# EAGLE board MicroMod-Artemis-ProcessorBoard-Panel (EAGLE 9.6.2), part 1 of 8
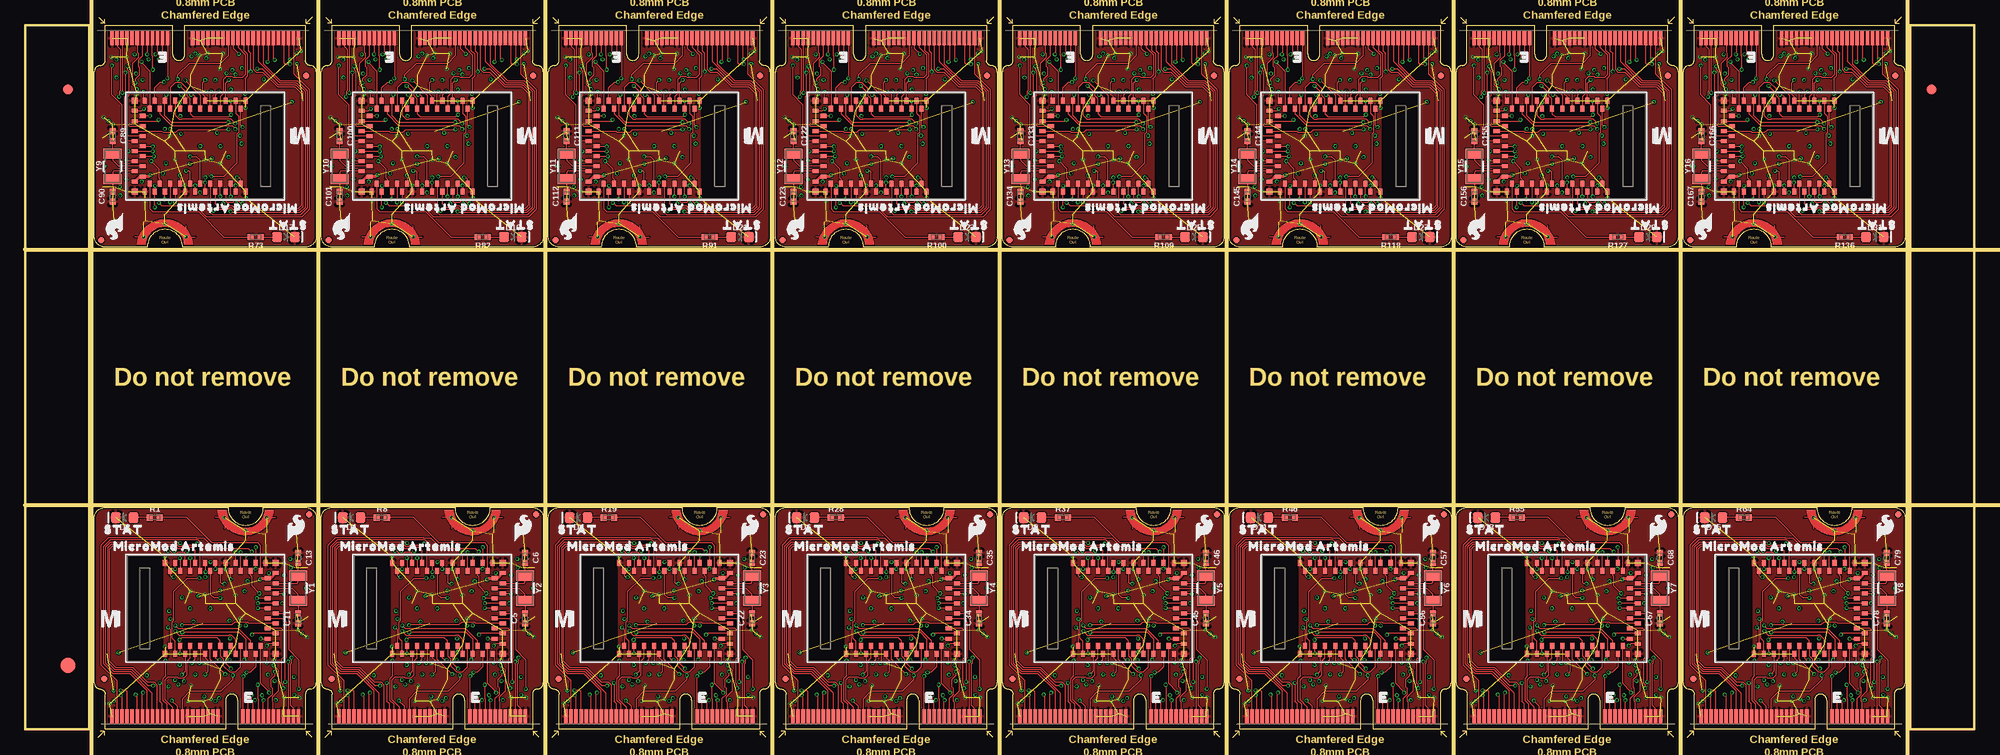
[diagram p0: board, top side]
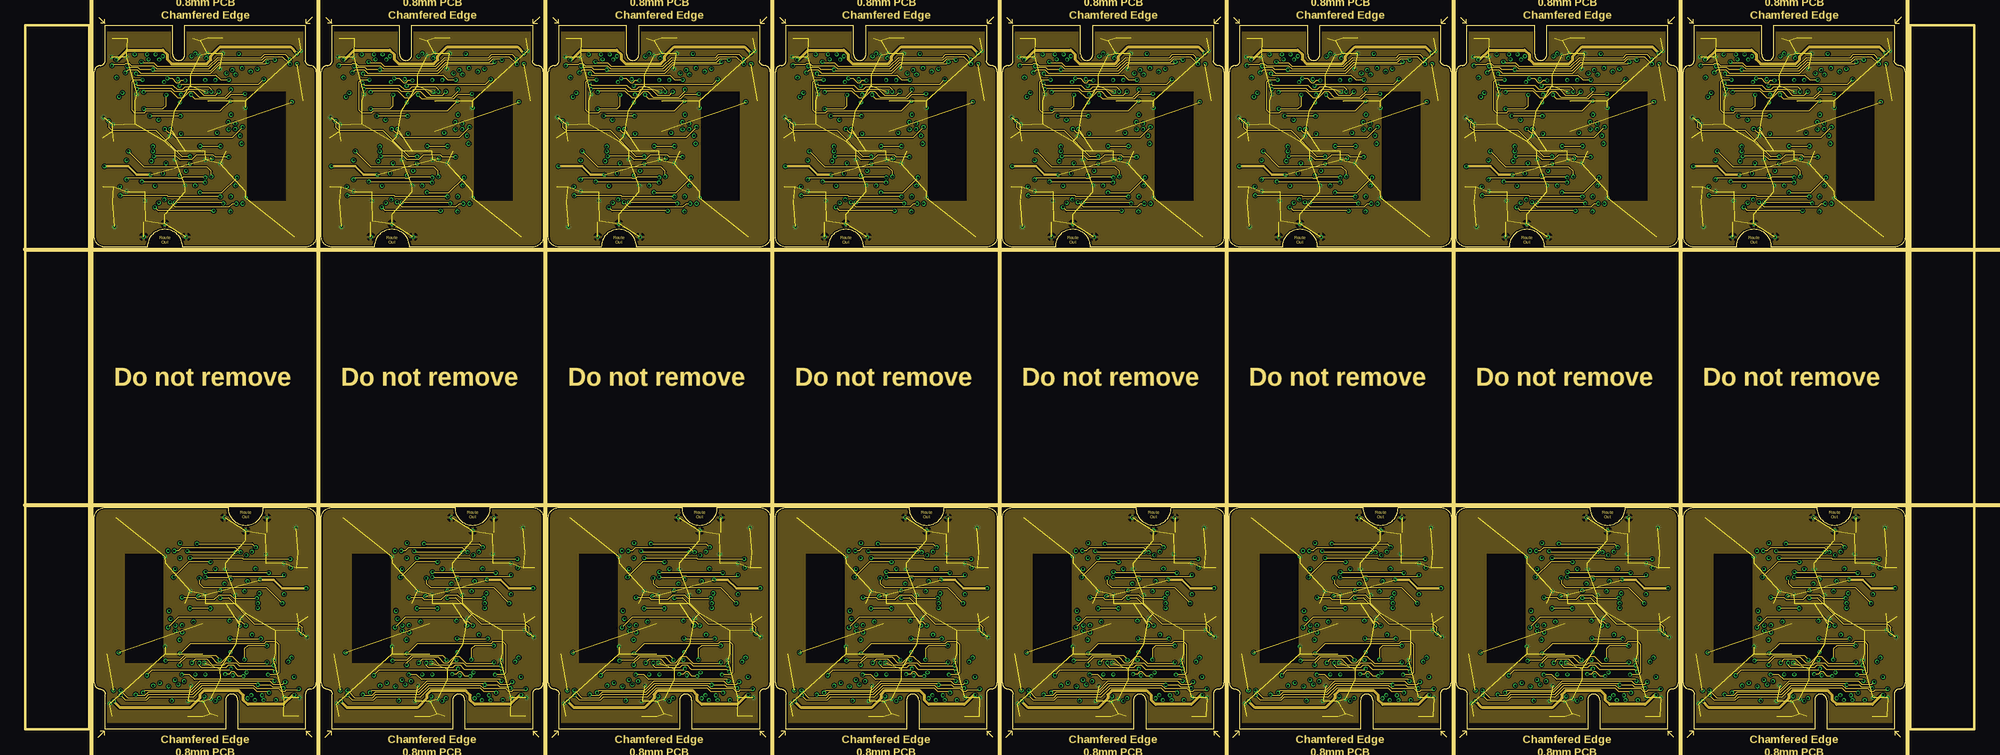
[diagram p1: board, inner layer Route2]
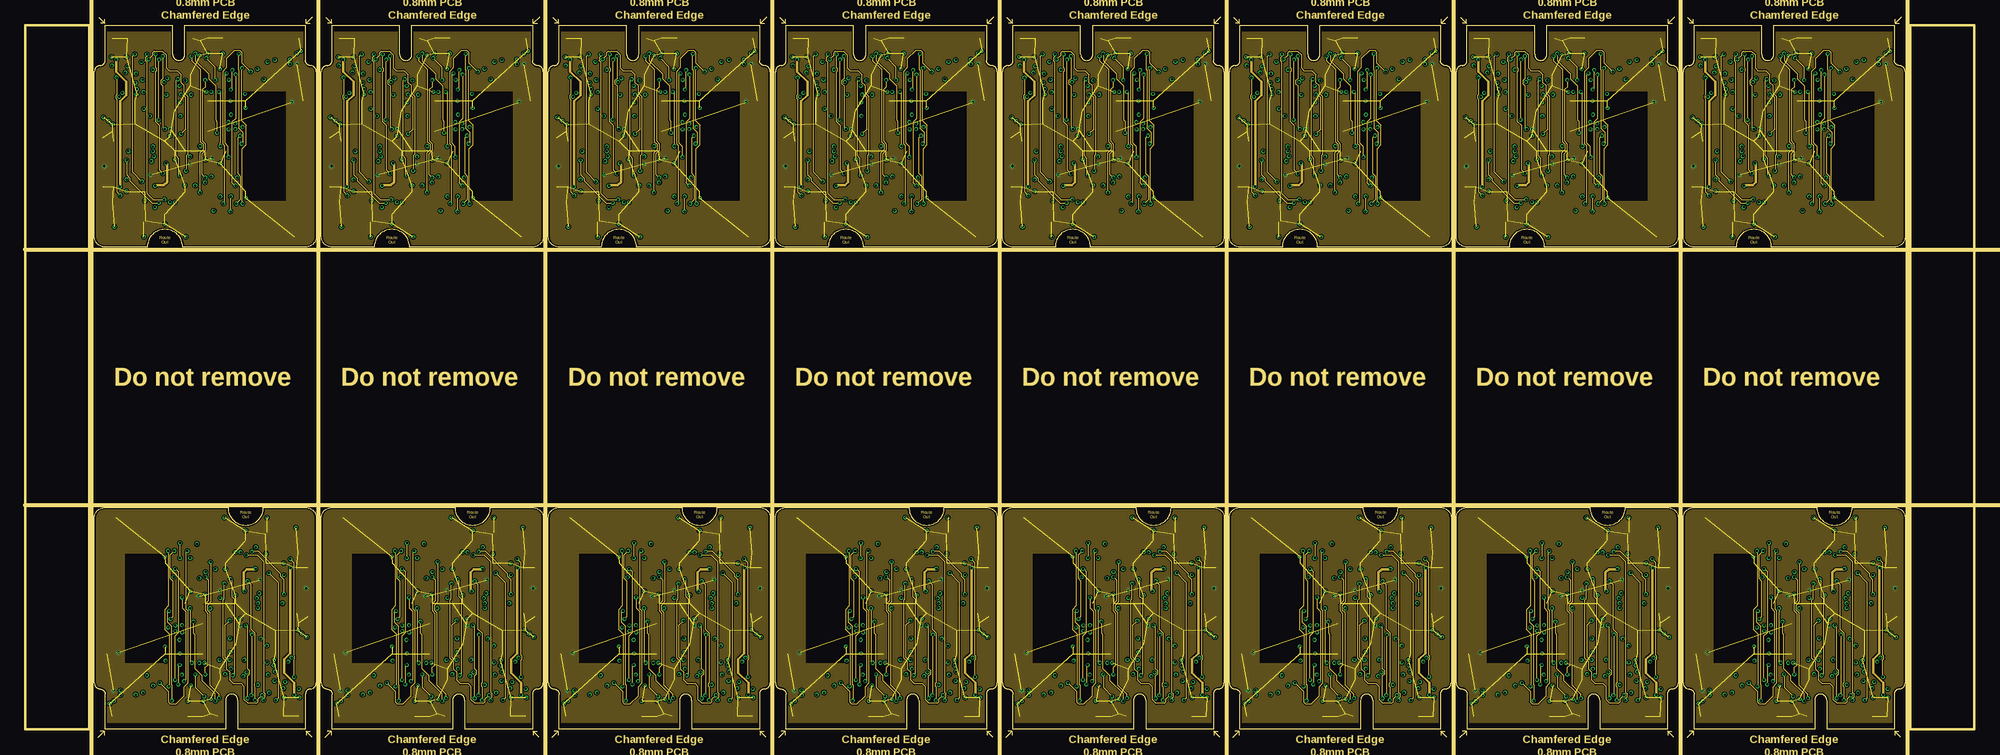
[diagram p2: board, inner layer Route15]
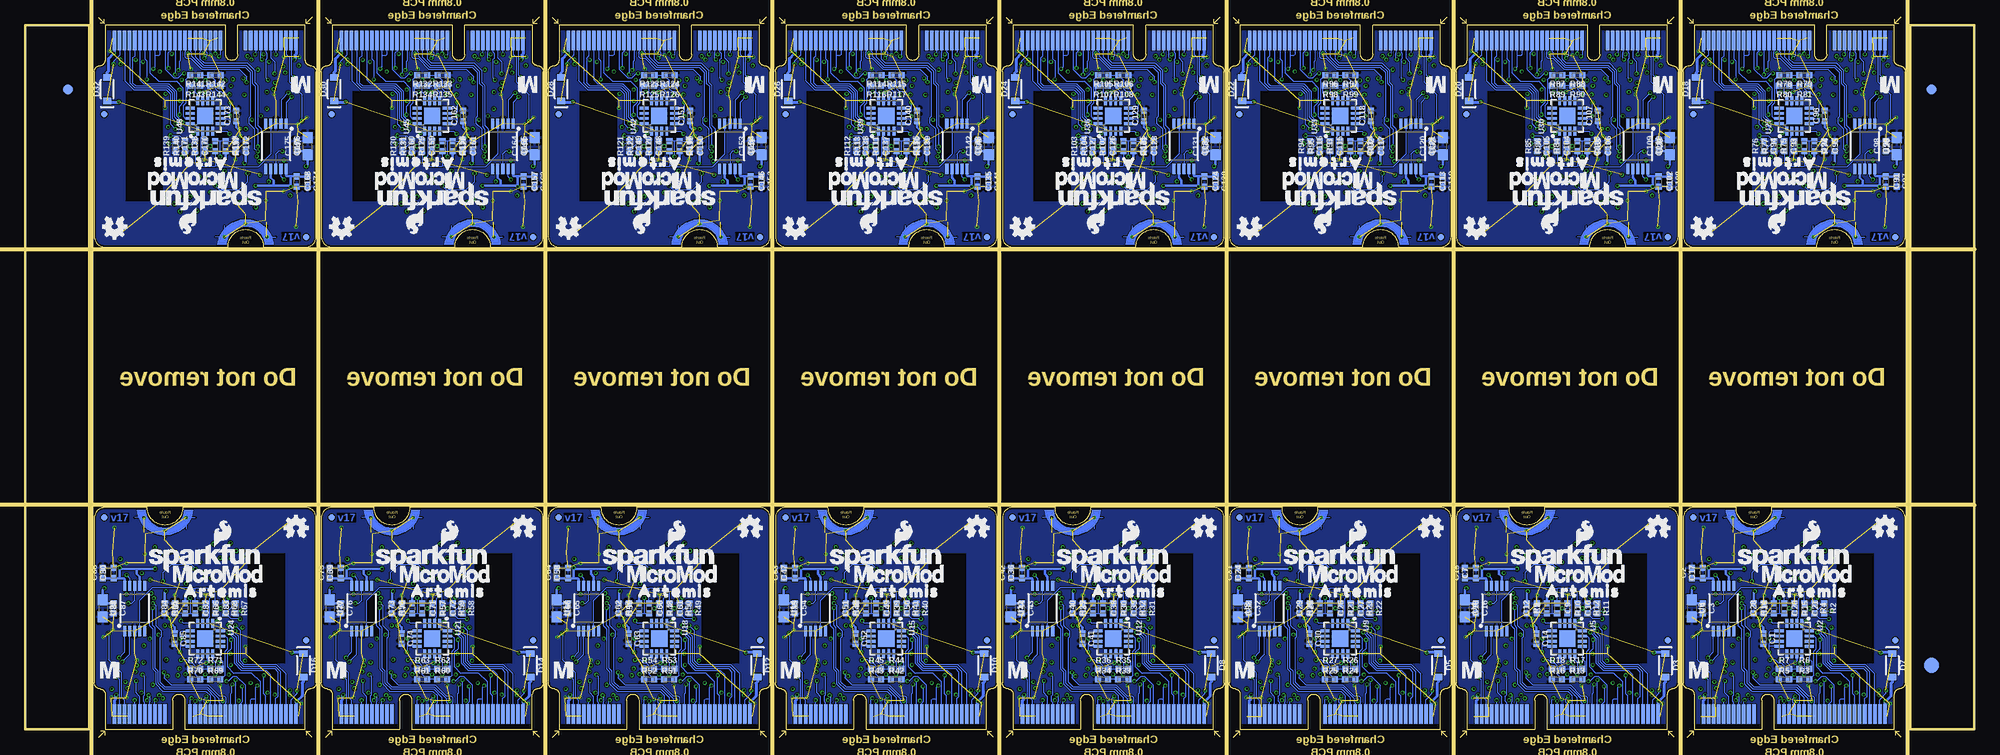
[diagram p3: board, bottom side, seen from below]

Size 193.27 x 69.85 mm. Coordinates in mm from the lower left corner, seen from the top.
Outline: 328 segments
Copper layers (1+2*15+16): Top 0.035mm / dielectric 1.5mm / Route2 0.035mm / dielectric 0.15mm / Route15 0.035mm / dielectric 0.2mm / Bottom 0.035mm
Design rules "MicroMod-Artemis-ProcessorBoard": minimum track width 4mil, minimum drill 0.2mm, track to track 4mil, track to pad 4mil, pad to pad 4mil, via to via 4mil, smd to smd 4mil, copper to edge 6mil, drill to drill 6mil, minimum pad ring 3mil, minimum via ring 3mil, stop-mask expansion 4mil, vias tented up to drill 25mil, thermal gap 10mil
Net classes: 0 default: width 0 mm, drill 0 mm
tKeepout: area 10,6.6 to 13.5,17.3; area 32.5,6.6 to 36,17.3; area 55,6.6 to 58.5,17.3; area 77.5,6.6 to 81,17.3; area 100,6.6 to 103.5,17.3; area 122.5,6.6 to 126,17.3; area 145,6.6 to 148.5,17.3; area 167.5,6.6 to 171,17.3; area 22.3,52.5 to 25.8,63.2; area 44.8,52.5 to 48.3,63.2; area 67.3,52.5 to 70.8,63.2; area 89.8,52.5 to 93.3,63.2; 4 more areas
Milling: 11 lines

## Footprints (pad centres in the part's own frame; a part is rotated, then mirrored left to right if it is on the bottom)
0402-TIGHT = smd 0.6 x 0.6: 1 -0.5,0; 2 0.5,0
0603 = smd 1.1 x 1: 1 -0.85,0; 2 0.85,0
LED-0603 = smd 1 x 1: A -0.877,0; C 0.877,0
SOD-323 = smd 0.63 x 0.83: A 1.15,0; C -1.15,0
FIDUCIAL-1X2 = smd 1 x 1: 1 0,0
FIDUCIAL-1.5X3 = smd 1.5 x 1.5: 1 0,0
FIDUCIAL-MICRO = smd 0.635 x 0.635: 1 0,0
M.2-CARD-E-22 = smd 0.35 x 1.45: 1 9.25,1.275; 3 8.75,1.275; 5 8.25,1.275; 7 7.75,1.275; 9 7.25,1.275; 11 6.75,1.275; 13 6.25,1.275; 15 5.75,1.275; 17 5.25,1.275; 19 4.75,1.275; 21 4.25,1.275; 23 3.75,1.275; 33 1.25,1.275; 35 0.75,1.275; 37 0.25,1.275; 39 -0.25,1.275; 41 -0.75,1.275; 43 -1.25,1.275; 45 -1.75,1.275; 47 -2.25,1.275; 49 -2.75,1.275; 51 -3.25,1.275; 53 -3.75,1.275; 55 -4.25,1.275; 57 -4.75,1.275; 59 -5.25,1.275; 61 -5.75,1.275; 63 -6.25,1.275; 65 -6.75,1.275; 67 -7.25,1.275; 69 -7.75,1.275; 71 -8.25,1.275; 73 -8.75,1.275; 75 -9.25,1.275 | smd 0.35 x 1.95 bottom: 2 9,1.525; 4 8.5,1.525; 6 8,1.525; 8 7.5,1.525; 10 7,1.525; 12 6.5,1.525; 14 6,1.525; 16 5.5,1.525; 18 5,1.525; 20 4.5,1.525; 22 4,1.525; 32 1.5,1.525; 34 1,1.525; 36 0.5,1.525; 38 0,1.525; 40 -0.5,1.525; 42 -1,1.525; 44 -1.5,1.525; 46 -2,1.525; 48 -2.5,1.525; 50 -3,1.525; 52 -3.5,1.525; 54 -4,1.525; 56 -4.5,1.525; 58 -5,1.525; 60 -5.5,1.525; 62 -6,1.525; 64 -6.5,1.525; 66 -7,1.525; 68 -7.5,1.525; 70 -8,1.525; 72 -8.5,1.525; 74 -9,1.525 | drill 0.2: GND1 1.9,21; GND2 4,19.7; GND3 6.1,21
ARTEMIS_FP = smd 0.4 x 0.6: AD16 -4,-3.7; BOOT 1.5,4.5; D0 0.5,-4.5; D1 -0.5,-4.5; D2 -1,-3.7; D3 2,-3.7; D7 -1.5,4.5; D8 -0.5,4.5; D9 2,3.7; D10 1,3.7; D14 -5,3.7; D17 -3.5,-4.5; D36 2.5,-4.5; D38 3,-3.7; D40 2.5,4.5; D41 -2.5,-4.5; GND@1 4.5,4.5; GND@39 -5.5,-4.5; GND@47 -1.5,-4.5; GND@59 4.5,-4.5; RXI-0 3.5,4.5; SWDCK 4,3.7; SWDIO 0,3.7; TXO-0 0.5,4.5; ~AD31 -3,-3.7; ~AD35 -2,3.7; ~D4 -2.5,4.5; ~D5 -1,3.7; ~D18 -4.5,-4.5; ~D19 -5,-3.7; ~D22 -3.5,4.5; ~D23 -4,3.7; ~D24 -3,3.7; ~D27 -4.5,4.5; ~D28 -5.5,4.5; ~D37 3.5,-4.5; ~D39 3,3.7; ~D42 1.5,-4.5; ~D43 1,-3.7; ~D44 4,-3.7; ~D45 -2,-3.7; ~RST 0,-3.7 | smd 0.6 x 0.4: AD34 -6.5,-0.5; D15 -6.5,0.5; VDD@36 -5.7,-3; VDD@37 -6.5,-3.5; XI -6.5,-2.5; XO -5.7,-2; ~AD11 -5.7,-1; ~AD12 -5.7,2; ~AD13 -5.7,1; ~AD29 -6.5,-1.5; ~AD32 -5.7,3; ~AD33/SWO -5.7,0; ~D6 -6.5,3.5; ~D25 -6.5,2.5; ~D26 -6.5,1.5 | smd 0.6 x 0.6: GND@22 -6.5,4.5; GND@38 -6.5,-4.5
QFN-16 = smd 0.9 x 0.29: 1 -1.5,0.75; 2 -1.5,0.25; 3 -1.5,-0.25; 4 -1.5,-0.75; 9 1.5,-0.75; 10 1.5,-0.25; 11 1.5,0.25; 12 1.5,0.75 | smd 0.29 x 0.9: 5 -0.75,-1.5; 6 -0.25,-1.5; 7 0.25,-1.5; 8 0.75,-1.5; 13 0.765,1.5; 14 0.25,1.5; 15 -0.25,1.5; 16 -0.75,1.5 | smd 1.6 x 1.6: 17 0,0
MSOP10 = smd 1 x 0.3: 1 -2.25,1; 2 -2.25,0.5; 3 -2.25,0; 4 -2.25,-0.5; 5 -2.25,-1; 6 2.25,-1; 7 2.25,-0.5; 8 2.25,0; 9 2.25,0.5; 10 2.25,1
CRYSTAL-SMD-3.2X1.5MM = smd 1 x 1.8: P$1 -1.25,0; P$2 1.25,0

## Placement (x,y rotation side)
C1  0.1uF  [0402-TIGHT]  20.91,9 270 bottom
C2  0.22uF  [0402-TIGHT]  28.02,15.5 90 bottom
C3  1.0uF  [0402-TIGHT]  26.92,12 270 bottom
C4  10uF  [0603]  28.02,12 270 bottom
C5  15pF  [0402-TIGHT]  49.56,11 90 top
C6  15pF  [0402-TIGHT]  49.56,17 270 top
C7  10nF  [0402-TIGHT]  49.42,15.5 90 bottom
C8  0.1uF  [0402-TIGHT]  44.36,12 270 bottom
C9  0.1uF  [0402-TIGHT]  41.36,12 270 bottom
C10  0.1uF  [0402-TIGHT]  39.36,12 270 bottom
C11  15pF  [0402-TIGHT]  27.06,11 90 top
C12  1.0nF  [0402-TIGHT]  43.36,12 90 bottom
C13  15pF  [0402-TIGHT]  27.06,17 270 top
C14  0.1uF  [0402-TIGHT]  43.41,9 270 bottom
C15  0.22uF  [0402-TIGHT]  50.52,15.5 90 bottom
C16  1.0uF  [0402-TIGHT]  49.42,12 270 bottom
C17  10nF  [0402-TIGHT]  26.92,15.5 90 bottom
C18  0.1uF  [0402-TIGHT]  21.86,12 270 bottom
C19  10uF  [0603]  50.52,12 270 bottom
C20  0.1uF  [0402-TIGHT]  18.86,12 270 bottom
C21  0.1uF  [0402-TIGHT]  16.86,12 270 bottom
C22  15pF  [0402-TIGHT]  72.07,11 90 top
C23  15pF  [0402-TIGHT]  72.07,17 270 top
C24  10nF  [0402-TIGHT]  71.93,15.5 90 bottom
C25  0.1uF  [0402-TIGHT]  66.87,12 270 bottom
C26  0.1uF  [0402-TIGHT]  63.87,12 270 bottom
C27  0.1uF  [0402-TIGHT]  61.87,12 270 bottom
C28  1.0nF  [0402-TIGHT]  20.86,12 90 bottom
C29  1.0nF  [0402-TIGHT]  65.87,12 90 bottom
C30  0.1uF  [0402-TIGHT]  65.92,9 270 bottom
C31  0.22uF  [0402-TIGHT]  73.03,15.5 90 bottom
C32  1.0uF  [0402-TIGHT]  71.93,12 270 bottom
C33  10uF  [0603]  73.03,12 270 bottom
C34  15pF  [0402-TIGHT]  94.58,11 90 top
C35  15pF  [0402-TIGHT]  94.58,17 270 top
C36  10nF  [0402-TIGHT]  94.44,15.5 90 bottom
C37  0.1uF  [0402-TIGHT]  89.38,12 270 bottom
C38  0.1uF  [0402-TIGHT]  86.38,12 270 bottom
C39  0.1uF  [0402-TIGHT]  84.38,12 270 bottom
C40  1.0nF  [0402-TIGHT]  88.38,12 90 bottom
C41  0.1uF  [0402-TIGHT]  88.43,9 270 bottom
C42  0.22uF  [0402-TIGHT]  95.54,15.5 90 bottom
C43  1.0uF  [0402-TIGHT]  94.44,12 270 bottom
C44  10uF  [0603]  95.54,12 270 bottom
C45  15pF  [0402-TIGHT]  117.09,11 90 top
C46  15pF  [0402-TIGHT]  117.09,17 270 top
C47  10nF  [0402-TIGHT]  116.95,15.5 90 bottom
C48  0.1uF  [0402-TIGHT]  111.89,12 270 bottom
C49  0.1uF  [0402-TIGHT]  108.89,12 270 bottom
C50  0.1uF  [0402-TIGHT]  106.89,12 270 bottom
C51  1.0nF  [0402-TIGHT]  110.89,12 90 bottom
C52  0.1uF  [0402-TIGHT]  110.94,9 270 bottom
C53  0.22uF  [0402-TIGHT]  118.05,15.5 90 bottom
C54  1.0uF  [0402-TIGHT]  116.95,12 270 bottom
C55  10uF  [0603]  118.05,12 270 bottom
C56  15pF  [0402-TIGHT]  139.6,11 90 top
C57  15pF  [0402-TIGHT]  139.6,17 270 top
C58  10nF  [0402-TIGHT]  139.46,15.5 90 bottom
C59  0.1uF  [0402-TIGHT]  134.4,12 270 bottom
C60  0.1uF  [0402-TIGHT]  131.4,12 270 bottom
C61  0.1uF  [0402-TIGHT]  129.4,12 270 bottom
C62  1.0nF  [0402-TIGHT]  133.4,12 90 bottom
C63  0.1uF  [0402-TIGHT]  133.45,9 270 bottom
C64  0.22uF  [0402-TIGHT]  140.56,15.5 90 bottom
C65  1.0uF  [0402-TIGHT]  139.46,12 270 bottom
C66  10uF  [0603]  140.56,12 270 bottom
C67  15pF  [0402-TIGHT]  162.11,11 90 top
C68  15pF  [0402-TIGHT]  162.11,17 270 top
C69  10nF  [0402-TIGHT]  161.97,15.5 90 bottom
C70  0.1uF  [0402-TIGHT]  156.91,12 270 bottom
C71  0.1uF  [0402-TIGHT]  153.91,12 270 bottom
C72  0.1uF  [0402-TIGHT]  151.91,12 270 bottom
C73  1.0nF  [0402-TIGHT]  155.91,12 90 bottom
C74  0.1uF  [0402-TIGHT]  155.96,9 270 bottom
C75  0.22uF  [0402-TIGHT]  163.07,15.5 90 bottom
C76  1.0uF  [0402-TIGHT]  161.97,12 270 bottom
C77  10uF  [0603]  163.07,12 270 bottom
C78  15pF  [0402-TIGHT]  184.61,11 90 top
C79  15pF  [0402-TIGHT]  184.61,17 270 top
C80  10nF  [0402-TIGHT]  184.47,15.5 90 bottom
C81  0.1uF  [0402-TIGHT]  179.41,12 270 bottom
C82  0.1uF  [0402-TIGHT]  176.41,12 270 bottom
C83  0.1uF  [0402-TIGHT]  174.41,12 270 bottom
C84  1.0nF  [0402-TIGHT]  178.41,12 90 bottom
C85  0.1uF  [0402-TIGHT]  178.46,9 270 bottom
C86  0.22uF  [0402-TIGHT]  185.57,15.5 90 bottom
C87  1.0uF  [0402-TIGHT]  184.47,12 270 bottom
C88  10uF  [0603]  185.57,12 270 bottom
C89  15pF  [0402-TIGHT]  8.66,58.85 270 top
C90  15pF  [0402-TIGHT]  8.66,52.85 90 top
C91  10nF  [0402-TIGHT]  8.8,54.35 270 bottom
C92  0.1uF  [0402-TIGHT]  13.86,57.85 90 bottom
C93  0.1uF  [0402-TIGHT]  16.86,57.85 90 bottom
C94  0.1uF  [0402-TIGHT]  18.86,57.85 90 bottom
C95  1.0nF  [0402-TIGHT]  14.86,57.85 270 bottom
C96  0.1uF  [0402-TIGHT]  14.81,60.85 90 bottom
C97  0.22uF  [0402-TIGHT]  7.7,54.35 270 bottom
C98  1.0uF  [0402-TIGHT]  8.8,57.85 90 bottom
C99  10uF  [0603]  7.7,57.85 90 bottom
C100  15pF  [0402-TIGHT]  31.17,58.85 270 top
C101  15pF  [0402-TIGHT]  31.17,52.85 90 top
C102  10nF  [0402-TIGHT]  31.31,54.35 270 bottom
C103  0.1uF  [0402-TIGHT]  36.37,57.85 90 bottom
C104  0.1uF  [0402-TIGHT]  39.37,57.85 90 bottom
C105  0.1uF  [0402-TIGHT]  41.37,57.85 90 bottom
C106  1.0nF  [0402-TIGHT]  37.37,57.85 270 bottom
C107  0.1uF  [0402-TIGHT]  37.32,60.85 90 bottom
C108  0.22uF  [0402-TIGHT]  30.21,54.35 270 bottom
C109  1.0uF  [0402-TIGHT]  31.31,57.85 90 bottom
C110  10uF  [0603]  30.21,57.85 90 bottom
C111  15pF  [0402-TIGHT]  53.67,58.85 270 top
C112  15pF  [0402-TIGHT]  53.67,52.85 90 top
C113  10nF  [0402-TIGHT]  53.81,54.35 270 bottom
C114  0.1uF  [0402-TIGHT]  58.87,57.85 90 bottom
C115  0.1uF  [0402-TIGHT]  61.87,57.85 90 bottom
C116  0.1uF  [0402-TIGHT]  63.87,57.85 90 bottom
C117  1.0nF  [0402-TIGHT]  59.87,57.85 270 bottom
C118  0.1uF  [0402-TIGHT]  59.82,60.85 90 bottom
C119  0.22uF  [0402-TIGHT]  52.71,54.35 270 bottom
C120  1.0uF  [0402-TIGHT]  53.81,57.85 90 bottom
C121  10uF  [0603]  52.71,57.85 90 bottom
C122  15pF  [0402-TIGHT]  76.18,58.85 270 top
C123  15pF  [0402-TIGHT]  76.18,52.85 90 top
C124  10nF  [0402-TIGHT]  76.32,54.35 270 bottom
C125  0.1uF  [0402-TIGHT]  81.38,57.85 90 bottom
C126  0.1uF  [0402-TIGHT]  84.38,57.85 90 bottom
C127  0.1uF  [0402-TIGHT]  86.38,57.85 90 bottom
C128  1.0nF  [0402-TIGHT]  82.38,57.85 270 bottom
C129  0.1uF  [0402-TIGHT]  82.33,60.85 90 bottom
C130  0.22uF  [0402-TIGHT]  75.22,54.35 270 bottom
C131  1.0uF  [0402-TIGHT]  76.32,57.85 90 bottom
C132  10uF  [0603]  75.22,57.85 90 bottom
C133  15pF  [0402-TIGHT]  98.69,58.85 270 top
C134  15pF  [0402-TIGHT]  98.69,52.85 90 top
C135  10nF  [0402-TIGHT]  98.83,54.35 270 bottom
C136  0.1uF  [0402-TIGHT]  103.89,57.85 90 bottom
C137  0.1uF  [0402-TIGHT]  106.89,57.85 90 bottom
C138  0.1uF  [0402-TIGHT]  108.89,57.85 90 bottom
C139  1.0nF  [0402-TIGHT]  104.89,57.85 270 bottom
C140  0.1uF  [0402-TIGHT]  104.84,60.85 90 bottom
C141  0.22uF  [0402-TIGHT]  97.73,54.35 270 bottom
C142  1.0uF  [0402-TIGHT]  98.83,57.85 90 bottom
C143  10uF  [0603]  97.73,57.85 90 bottom
C144  15pF  [0402-TIGHT]  121.2,58.85 270 top
C145  15pF  [0402-TIGHT]  121.2,52.85 90 top
C146  10nF  [0402-TIGHT]  121.34,54.35 270 bottom
C147  0.1uF  [0402-TIGHT]  126.4,57.85 90 bottom
C148  0.1uF  [0402-TIGHT]  129.4,57.85 90 bottom
C149  0.1uF  [0402-TIGHT]  131.4,57.85 90 bottom
C150  1.0nF  [0402-TIGHT]  127.4,57.85 270 bottom
C151  0.1uF  [0402-TIGHT]  127.35,60.85 90 bottom
C152  0.22uF  [0402-TIGHT]  120.24,54.35 270 bottom
C153  1.0uF  [0402-TIGHT]  121.34,57.85 90 bottom
C154  10uF  [0603]  120.24,57.85 90 bottom
C155  15pF  [0402-TIGHT]  143.71,58.85 270 top
C156  15pF  [0402-TIGHT]  143.71,52.85 90 top
C157  10nF  [0402-TIGHT]  143.85,54.35 270 bottom
C158  0.1uF  [0402-TIGHT]  148.91,57.85 90 bottom
C159  0.1uF  [0402-TIGHT]  151.91,57.85 90 bottom
C160  0.1uF  [0402-TIGHT]  153.91,57.85 90 bottom
C161  1.0nF  [0402-TIGHT]  149.91,57.85 270 bottom
C162  0.1uF  [0402-TIGHT]  149.86,60.85 90 bottom
C163  0.22uF  [0402-TIGHT]  142.75,54.35 270 bottom
C164  1.0uF  [0402-TIGHT]  143.85,57.85 90 bottom
C165  10uF  [0603]  142.75,57.85 90 bottom
C166  15pF  [0402-TIGHT]  166.21,58.85 270 top
C167  15pF  [0402-TIGHT]  166.21,52.85 90 top
C168  10nF  [0402-TIGHT]  166.35,54.35 270 bottom
C169  0.1uF  [0402-TIGHT]  171.41,57.85 90 bottom
C170  0.1uF  [0402-TIGHT]  174.41,57.85 90 bottom
C171  0.1uF  [0402-TIGHT]  176.41,57.85 90 bottom
C172  1.0nF  [0402-TIGHT]  172.41,57.85 270 bottom
C173  0.1uF  [0402-TIGHT]  172.36,60.85 90 bottom
C174  0.22uF  [0402-TIGHT]  165.25,54.35 270 bottom
C175  1.0uF  [0402-TIGHT]  166.35,57.85 90 bottom
C176  10uF  [0603]  165.25,57.85 90 bottom
D1  BLUE  [LED-0603]  32.36,21 180 top
D2  BLUE  [LED-0603]  9.86,21 180 top
D3  1A/23V/620mV  [SOD-323]  30.63,6.35 270 bottom
D4  BLUE  [LED-0603]  54.87,21 180 top
D5  1A/23V/620mV  [SOD-323]  53.14,6.35 270 bottom
D6  BLUE  [LED-0603]  77.38,21 180 top
D7  1A/23V/620mV  [SOD-323]  8.13,6.35 270 bottom
D8  1A/23V/620mV  [SOD-323]  75.65,6.35 270 bottom
D9  BLUE  [LED-0603]  99.89,21 180 top
D10  1A/23V/620mV  [SOD-323]  98.16,6.35 270 bottom
D11  BLUE  [LED-0603]  122.4,21 180 top
D12  1A/23V/620mV  [SOD-323]  120.67,6.35 270 bottom
D13  BLUE  [LED-0603]  144.91,21 180 top
D14  1A/23V/620mV  [SOD-323]  143.18,6.35 270 bottom
D15  BLUE  [LED-0603]  167.41,21 180 top
D16  1A/23V/620mV  [SOD-323]  165.68,6.35 270 bottom
D17  BLUE  [LED-0603]  25.86,48.85 0 top
D18  1A/23V/620mV  [SOD-323]  27.59,63.5 90 bottom
D19  BLUE  [LED-0603]  48.37,48.85 0 top
D20  1A/23V/620mV  [SOD-323]  50.1,63.5 90 bottom
D21  BLUE  [LED-0603]  70.87,48.85 0 top
D22  1A/23V/620mV  [SOD-323]  72.6,63.5 90 bottom
D23  BLUE  [LED-0603]  93.38,48.85 0 top
D24  1A/23V/620mV  [SOD-323]  95.11,63.5 90 bottom
D25  BLUE  [LED-0603]  115.89,48.85 0 top
D26  1A/23V/620mV  [SOD-323]  117.62,63.5 90 bottom
D27  BLUE  [LED-0603]  138.4,48.85 0 top
D28  1A/23V/620mV  [SOD-323]  140.13,63.5 90 bottom
D29  BLUE  [LED-0603]  160.91,48.85 0 top
D30  1A/23V/620mV  [SOD-323]  162.64,63.5 90 bottom
D31  BLUE  [LED-0603]  183.41,48.85 0 top
D32  1A/23V/620mV  [SOD-323]  185.14,63.5 90 bottom
E$1  [FIDUCIAL-1X2]  4.23,63.5 0 top
E$2  [FIDUCIAL-1X2]  4.23,63.5 0 bottom
E$3  [FIDUCIAL-1X2]  189.04,63.5 0 top
E$4  [FIDUCIAL-1X2]  189.04,63.5 0 bottom
E$5  [FIDUCIAL-1.5X3]  4.23,6.35 0 top
E$6  [FIDUCIAL-1.5X3]  4.23,6.35 0 bottom
FD1  FIDUCIALUFIDUCIAL  [FIDUCIAL-MICRO]  7.86,5 0 top
FD2  FIDUCIALUFIDUCIAL  [FIDUCIAL-MICRO]  28.16,21.3 0 top
FD3  FIDUCIALUFIDUCIAL  [FIDUCIAL-MICRO]  27.86,21 0 bottom
FD4  FIDUCIALUFIDUCIAL  [FIDUCIAL-MICRO]  7.86,8.81 0 bottom
FD5  FIDUCIALUFIDUCIAL  [FIDUCIAL-MICRO]  30.36,5 0 top
FD6  FIDUCIALUFIDUCIAL  [FIDUCIAL-MICRO]  50.66,21.3 0 top
FD7  FIDUCIALUFIDUCIAL  [FIDUCIAL-MICRO]  50.36,21 0 bottom
FD8  FIDUCIALUFIDUCIAL  [FIDUCIAL-MICRO]  30.36,8.81 0 bottom
FD9  FIDUCIALUFIDUCIAL  [FIDUCIAL-MICRO]  52.87,5 0 top
FD10  FIDUCIALUFIDUCIAL  [FIDUCIAL-MICRO]  73.17,21.3 0 top
FD11  FIDUCIALUFIDUCIAL  [FIDUCIAL-MICRO]  72.87,21 0 bottom
FD12  FIDUCIALUFIDUCIAL  [FIDUCIAL-MICRO]  52.87,8.81 0 bottom
FD13  FIDUCIALUFIDUCIAL  [FIDUCIAL-MICRO]  75.38,5 0 top
FD14  FIDUCIALUFIDUCIAL  [FIDUCIAL-MICRO]  95.68,21.3 0 top
FD15  FIDUCIALUFIDUCIAL  [FIDUCIAL-MICRO]  95.38,21 0 bottom
FD16  FIDUCIALUFIDUCIAL  [FIDUCIAL-MICRO]  75.38,8.81 0 bottom
FD17  FIDUCIALUFIDUCIAL  [FIDUCIAL-MICRO]  97.89,5 0 top
FD18  FIDUCIALUFIDUCIAL  [FIDUCIAL-MICRO]  118.19,21.3 0 top
FD19  FIDUCIALUFIDUCIAL  [FIDUCIAL-MICRO]  117.89,21 0 bottom
FD20  FIDUCIALUFIDUCIAL  [FIDUCIAL-MICRO]  97.89,8.81 0 bottom
FD21  FIDUCIALUFIDUCIAL  [FIDUCIAL-MICRO]  120.4,5 0 top
FD22  FIDUCIALUFIDUCIAL  [FIDUCIAL-MICRO]  140.7,21.3 0 top
FD23  FIDUCIALUFIDUCIAL  [FIDUCIAL-MICRO]  140.4,21 0 bottom
FD24  FIDUCIALUFIDUCIAL  [FIDUCIAL-MICRO]  120.4,8.81 0 bottom
FD25  FIDUCIALUFIDUCIAL  [FIDUCIAL-MICRO]  142.91,5 0 top
FD26  FIDUCIALUFIDUCIAL  [FIDUCIAL-MICRO]  163.21,21.3 0 top
FD27  FIDUCIALUFIDUCIAL  [FIDUCIAL-MICRO]  162.91,21 0 bottom
FD28  FIDUCIALUFIDUCIAL  [FIDUCIAL-MICRO]  142.91,8.81 0 bottom
FD29  FIDUCIALUFIDUCIAL  [FIDUCIAL-MICRO]  165.41,5 0 top
FD30  FIDUCIALUFIDUCIAL  [FIDUCIAL-MICRO]  185.71,21.3 0 top
FD31  FIDUCIALUFIDUCIAL  [FIDUCIAL-MICRO]  185.41,21 0 bottom
FD32  FIDUCIALUFIDUCIAL  [FIDUCIAL-MICRO]  165.41,8.81 0 bottom
FD33  FIDUCIALUFIDUCIAL  [FIDUCIAL-MICRO]  27.86,64.85 180 top
FD34  FIDUCIALUFIDUCIAL  [FIDUCIAL-MICRO]  7.56,48.55 180 top
FD35  FIDUCIALUFIDUCIAL  [FIDUCIAL-MICRO]  7.86,48.85 180 bottom
FD36  FIDUCIALUFIDUCIAL  [FIDUCIAL-MICRO]  27.86,61.04 180 bottom
FD37  FIDUCIALUFIDUCIAL  [FIDUCIAL-MICRO]  50.37,64.85 180 top
FD38  FIDUCIALUFIDUCIAL  [FIDUCIAL-MICRO]  30.07,48.55 180 top
FD39  FIDUCIALUFIDUCIAL  [FIDUCIAL-MICRO]  30.37,48.85 180 bottom
FD40  FIDUCIALUFIDUCIAL  [FIDUCIAL-MICRO]  50.37,61.04 180 bottom
FD41  FIDUCIALUFIDUCIAL  [FIDUCIAL-MICRO]  72.87,64.85 180 top
FD42  FIDUCIALUFIDUCIAL  [FIDUCIAL-MICRO]  52.57,48.55 180 top
FD43  FIDUCIALUFIDUCIAL  [FIDUCIAL-MICRO]  52.87,48.85 180 bottom
FD44  FIDUCIALUFIDUCIAL  [FIDUCIAL-MICRO]  72.87,61.04 180 bottom
FD45  FIDUCIALUFIDUCIAL  [FIDUCIAL-MICRO]  95.38,64.85 180 top
FD46  FIDUCIALUFIDUCIAL  [FIDUCIAL-MICRO]  75.08,48.55 180 top
FD47  FIDUCIALUFIDUCIAL  [FIDUCIAL-MICRO]  75.38,48.85 180 bottom
FD48  FIDUCIALUFIDUCIAL  [FIDUCIAL-MICRO]  95.38,61.04 180 bottom
FD49  FIDUCIALUFIDUCIAL  [FIDUCIAL-MICRO]  117.89,64.85 180 top
FD50  FIDUCIALUFIDUCIAL  [FIDUCIAL-MICRO]  97.59,48.55 180 top
FD51  FIDUCIALUFIDUCIAL  [FIDUCIAL-MICRO]  97.89,48.85 180 bottom
FD52  FIDUCIALUFIDUCIAL  [FIDUCIAL-MICRO]  117.89,61.04 180 bottom
FD53  FIDUCIALUFIDUCIAL  [FIDUCIAL-MICRO]  140.4,64.85 180 top
FD54  FIDUCIALUFIDUCIAL  [FIDUCIAL-MICRO]  120.1,48.55 180 top
FD55  FIDUCIALUFIDUCIAL  [FIDUCIAL-MICRO]  120.4,48.85 180 bottom
FD56  FIDUCIALUFIDUCIAL  [FIDUCIAL-MICRO]  140.4,61.04 180 bottom
FD57  FIDUCIALUFIDUCIAL  [FIDUCIAL-MICRO]  162.91,64.85 180 top
FD58  FIDUCIALUFIDUCIAL  [FIDUCIAL-MICRO]  142.61,48.55 180 top
FD59  FIDUCIALUFIDUCIAL  [FIDUCIAL-MICRO]  142.91,48.85 180 bottom
FD60  FIDUCIALUFIDUCIAL  [FIDUCIAL-MICRO]  162.91,61.04 180 bottom
FD61  FIDUCIALUFIDUCIAL  [FIDUCIAL-MICRO]  185.41,64.85 180 top
FD62  FIDUCIALUFIDUCIAL  [FIDUCIAL-MICRO]  165.11,48.55 180 top
FD63  FIDUCIALUFIDUCIAL  [FIDUCIAL-MICRO]  165.41,48.85 180 bottom
FD64  FIDUCIALUFIDUCIAL  [FIDUCIAL-MICRO]  185.41,61.04 180 bottom
J1  MICROMOD-2222  [M.2-CARD-E-22]  17.86,0 0 top
J2  MICROMOD-2222  [M.2-CARD-E-22]  40.36,0 0 top
J3  MICROMOD-2222  [M.2-CARD-E-22]  62.87,0 0 top
J4  MICROMOD-2222  [M.2-CARD-E-22]  85.38,0 0 top
J5  MICROMOD-2222  [M.2-CARD-E-22]  107.89,0 0 top
J6  MICROMOD-2222  [M.2-CARD-E-22]  130.4,0 0 top
J7  MICROMOD-2222  [M.2-CARD-E-22]  152.91,0 0 top
J8  MICROMOD-2222  [M.2-CARD-E-22]  175.41,0 0 top
J9  MICROMOD-2222  [M.2-CARD-E-22]  17.86,69.85 180 top
J10  MICROMOD-2222  [M.2-CARD-E-22]  40.37,69.85 180 top
J11  MICROMOD-2222  [M.2-CARD-E-22]  62.87,69.85 180 top
J12  MICROMOD-2222  [M.2-CARD-E-22]  85.38,69.85 180 top
J13  MICROMOD-2222  [M.2-CARD-E-22]  107.89,69.85 180 top
J14  MICROMOD-2222  [M.2-CARD-E-22]  130.4,69.85 180 top
J15  MICROMOD-2222  [M.2-CARD-E-22]  152.91,69.85 180 top
J16  MICROMOD-2222  [M.2-CARD-E-22]  175.41,69.85 180 top
LOGO1  SFE_LOGO_NAME_FLAME.1_INCH  [SFE_LOGO_NAME_FLAME_.1]  17.86,17 0 bottom
LOGO2  SFE_LOGO_FLAME.1_INCH  [SFE_LOGO_FLAME_.1]  26.86,20 0 top
LOGO3  OSHW-LOGOMINI  [OSHW-LOGO-MINI]  8.86,20 0 bottom
LOGO4  OSHW-LOGOMINI  [OSHW-LOGO-MINI]  31.36,20 0 bottom
LOGO5  SFE_LOGO_NAME_FLAME.1_INCH  [SFE_LOGO_NAME_FLAME_.1]  40.36,17 0 bottom
LOGO6  SFE_LOGO_FLAME.1_INCH  [SFE_LOGO_FLAME_.1]  49.36,20 0 top
LOGO7  OSHW-LOGOMINI  [OSHW-LOGO-MINI]  53.87,20 0 bottom
LOGO8  SFE_LOGO_NAME_FLAME.1_INCH  [SFE_LOGO_NAME_FLAME_.1]  62.87,17 0 bottom
LOGO9  SFE_LOGO_FLAME.1_INCH  [SFE_LOGO_FLAME_.1]  71.87,20 0 top
LOGO10  OSHW-LOGOMINI  [OSHW-LOGO-MINI]  76.38,20 0 bottom
LOGO11  SFE_LOGO_NAME_FLAME.1_INCH  [SFE_LOGO_NAME_FLAME_.1]  85.38,17 0 bottom
LOGO12  SFE_LOGO_FLAME.1_INCH  [SFE_LOGO_FLAME_.1]  94.38,20 0 top
LOGO13  OSHW-LOGOMINI  [OSHW-LOGO-MINI]  98.89,20 0 bottom
LOGO14  SFE_LOGO_NAME_FLAME.1_INCH  [SFE_LOGO_NAME_FLAME_.1]  107.89,17 0 bottom
LOGO15  SFE_LOGO_FLAME.1_INCH  [SFE_LOGO_FLAME_.1]  116.89,20 0 top
LOGO16  OSHW-LOGOMINI  [OSHW-LOGO-MINI]  121.4,20 0 bottom
LOGO17  SFE_LOGO_NAME_FLAME.1_INCH  [SFE_LOGO_NAME_FLAME_.1]  130.4,17 0 bottom
LOGO18  SFE_LOGO_FLAME.1_INCH  [SFE_LOGO_FLAME_.1]  139.4,20 0 top
LOGO19  OSHW-LOGOMINI  [OSHW-LOGO-MINI]  143.91,20 0 bottom
LOGO20  SFE_LOGO_NAME_FLAME.1_INCH  [SFE_LOGO_NAME_FLAME_.1]  152.91,17 0 bottom
LOGO21  SFE_LOGO_FLAME.1_INCH  [SFE_LOGO_FLAME_.1]  161.91,20 0 top
LOGO22  OSHW-LOGOMINI  [OSHW-LOGO-MINI]  166.41,20 0 bottom
LOGO23  SFE_LOGO_NAME_FLAME.1_INCH  [SFE_LOGO_NAME_FLAME_.1]  175.41,17 0 bottom
LOGO24  SFE_LOGO_FLAME.1_INCH  [SFE_LOGO_FLAME_.1]  184.41,20 0 top
LOGO25  OSHW-LOGOMINI  [OSHW-LOGO-MINI]  26.86,49.85 180 bottom
LOGO26  SFE_LOGO_NAME_FLAME.1_INCH  [SFE_LOGO_NAME_FLAME_.1]  17.86,52.85 180 bottom
LOGO27  SFE_LOGO_FLAME.1_INCH  [SFE_LOGO_FLAME_.1]  8.86,49.85 180 top
LOGO28  OSHW-LOGOMINI  [OSHW-LOGO-MINI]  49.37,49.85 180 bottom
LOGO29  SFE_LOGO_NAME_FLAME.1_INCH  [SFE_LOGO_NAME_FLAME_.1]  40.37,52.85 180 bottom
LOGO30  SFE_LOGO_FLAME.1_INCH  [SFE_LOGO_FLAME_.1]  31.37,49.85 180 top
LOGO31  OSHW-LOGOMINI  [OSHW-LOGO-MINI]  71.87,49.85 180 bottom
LOGO32  SFE_LOGO_NAME_FLAME.1_INCH  [SFE_LOGO_NAME_FLAME_.1]  62.87,52.85 180 bottom
LOGO33  SFE_LOGO_FLAME.1_INCH  [SFE_LOGO_FLAME_.1]  53.87,49.85 180 top
LOGO34  OSHW-LOGOMINI  [OSHW-LOGO-MINI]  94.38,49.85 180 bottom
LOGO35  SFE_LOGO_NAME_FLAME.1_INCH  [SFE_LOGO_NAME_FLAME_.1]  85.38,52.85 180 bottom
LOGO36  SFE_LOGO_FLAME.1_INCH  [SFE_LOGO_FLAME_.1]  76.38,49.85 180 top
LOGO37  OSHW-LOGOMINI  [OSHW-LOGO-MINI]  116.89,49.85 180 bottom
LOGO38  SFE_LOGO_NAME_FLAME.1_INCH  [SFE_LOGO_NAME_FLAME_.1]  107.89,52.85 180 bottom
LOGO39  SFE_LOGO_FLAME.1_INCH  [SFE_LOGO_FLAME_.1]  98.89,49.85 180 top
LOGO40  OSHW-LOGOMINI  [OSHW-LOGO-MINI]  139.4,49.85 180 bottom
LOGO41  SFE_LOGO_NAME_FLAME.1_INCH  [SFE_LOGO_NAME_FLAME_.1]  130.4,52.85 180 bottom
LOGO42  SFE_LOGO_FLAME.1_INCH  [SFE_LOGO_FLAME_.1]  121.4,49.85 180 top
LOGO43  OSHW-LOGOMINI  [OSHW-LOGO-MINI]  161.91,49.85 180 bottom
LOGO44  SFE_LOGO_NAME_FLAME.1_INCH  [SFE_LOGO_NAME_FLAME_.1]  152.91,52.85 180 bottom
LOGO45  SFE_LOGO_FLAME.1_INCH  [SFE_LOGO_FLAME_.1]  143.91,49.85 180 top
LOGO46  OSHW-LOGOMINI  [OSHW-LOGO-MINI]  184.41,49.85 180 bottom
LOGO47  SFE_LOGO_NAME_FLAME.1_INCH  [SFE_LOGO_NAME_FLAME_.1]  175.41,52.85 180 bottom
LOGO48  SFE_LOGO_FLAME.1_INCH  [SFE_LOGO_FLAME_.1]  166.41,49.85 180 top
R1  1k  [0402-TIGHT]  12.86,21 0 top
R2  100k  [0402-TIGHT]  14.86,12 270 bottom
R3  100k  [0402-TIGHT]  16.87,4.95 0 bottom
R4  150k  [0402-TIGHT]  15.86,12 270 bottom
R5  150k  [0402-TIGHT]  18.87,4.95 0 bottom
R6  100k  [0402-TIGHT]  16.86,6 0 bottom
R7  150k  [0402-TIGHT]  18.86,6 0 bottom
R8  1k  [0402-TIGHT]  35.36,21 0 top
R9  100k  [0402-TIGHT]  42.36,12 90 bottom
R10  220K  [0402-TIGHT]  40.36,12 270 bottom
R11  100k  [0402-TIGHT]  37.36,12 270 bottom
R12  150k  [0402-TIGHT]  38.36,12 270 bottom
R13  100k  [0402-TIGHT]  39.37,4.95 0 bottom
R14  100k  [0402-TIGHT]  19.86,12 90 bottom
R15  220K  [0402-TIGHT]  17.86,12 270 bottom
R16  150k  [0402-TIGHT]  41.37,4.95 0 bottom
R17  100k  [0402-TIGHT]  39.36,6 0 bottom
R18  150k  [0402-TIGHT]  41.36,6 0 bottom
R19  1k  [0402-TIGHT]  57.87,21 0 top
R20  100k  [0402-TIGHT]  64.87,12 90 bottom
R21  220K  [0402-TIGHT]  62.87,12 270 bottom
R22  100k  [0402-TIGHT]  59.87,12 270 bottom
R23  150k  [0402-TIGHT]  60.87,12 270 bottom
R24  100k  [0402-TIGHT]  61.88,4.95 0 bottom
R25  150k  [0402-TIGHT]  63.88,4.95 0 bottom
R26  100k  [0402-TIGHT]  61.87,6 0 bottom
R27  150k  [0402-TIGHT]  63.87,6 0 bottom
R28  1k  [0402-TIGHT]  80.38,21 0 top
R29  100k  [0402-TIGHT]  87.38,12 90 bottom
R30  220K  [0402-TIGHT]  85.38,12 270 bottom
R31  100k  [0402-TIGHT]  82.38,12 270 bottom
R32  150k  [0402-TIGHT]  83.38,12 270 bottom
R33  100k  [0402-TIGHT]  84.39,4.95 0 bottom
R34  150k  [0402-TIGHT]  86.39,4.95 0 bottom
R35  100k  [0402-TIGHT]  84.38,6 0 bottom
R36  150k  [0402-TIGHT]  86.38,6 0 bottom
R37  1k  [0402-TIGHT]  102.89,21 0 top
R38  100k  [0402-TIGHT]  109.89,12 90 bottom
R39  220K  [0402-TIGHT]  107.89,12 270 bottom
R40  100k  [0402-TIGHT]  104.89,12 270 bottom
R41  150k  [0402-TIGHT]  105.89,12 270 bottom
R42  100k  [0402-TIGHT]  106.9,4.95 0 bottom
R43  150k  [0402-TIGHT]  108.9,4.95 0 bottom
R44  100k  [0402-TIGHT]  106.89,6 0 bottom
R45  150k  [0402-TIGHT]  108.89,6 0 bottom
R46  1k  [0402-TIGHT]  125.4,21 0 top
R47  100k  [0402-TIGHT]  132.4,12 90 bottom
R48  220K  [0402-TIGHT]  130.4,12 270 bottom
R49  100k  [0402-TIGHT]  127.4,12 270 bottom
R50  150k  [0402-TIGHT]  128.4,12 270 bottom
R51  100k  [0402-TIGHT]  129.41,4.95 0 bottom
R52  150k  [0402-TIGHT]  131.41,4.95 0 bottom
R53  100k  [0402-TIGHT]  129.4,6 0 bottom
R54  150k  [0402-TIGHT]  131.4,6 0 bottom
R55  1k  [0402-TIGHT]  147.91,21 0 top
R56  100k  [0402-TIGHT]  154.91,12 90 bottom
R57  220K  [0402-TIGHT]  152.91,12 270 bottom
R58  100k  [0402-TIGHT]  149.91,12 270 bottom
R59  150k  [0402-TIGHT]  150.91,12 270 bottom
R60  100k  [0402-TIGHT]  151.92,4.95 0 bottom
R61  150k  [0402-TIGHT]  153.92,4.95 0 bottom
R62  100k  [0402-TIGHT]  151.91,6 0 bottom
R63  150k  [0402-TIGHT]  153.91,6 0 bottom
R64  1k  [0402-TIGHT]  170.41,21 0 top
R65  100k  [0402-TIGHT]  177.41,12 90 bottom
R66  220K  [0402-TIGHT]  175.41,12 270 bottom
R67  100k  [0402-TIGHT]  172.41,12 270 bottom
R68  150k  [0402-TIGHT]  173.41,12 270 bottom
R69  100k  [0402-TIGHT]  174.42,4.95 0 bottom
R70  150k  [0402-TIGHT]  176.42,4.95 0 bottom
R71  100k  [0402-TIGHT]  174.41,6 0 bottom
R72  150k  [0402-TIGHT]  176.41,6 0 bottom
R73  1k  [0402-TIGHT]  22.86,48.85 180 top
R74  100k  [0402-TIGHT]  15.86,57.85 270 bottom
R75  220K  [0402-TIGHT]  17.86,57.85 90 bottom
R76  100k  [0402-TIGHT]  20.86,57.85 90 bottom
R77  150k  [0402-TIGHT]  19.86,57.85 90 bottom
R78  100k  [0402-TIGHT]  18.85,64.9 180 bottom
R79  150k  [0402-TIGHT]  16.85,64.9 180 bottom
R80  100k  [0402-TIGHT]  18.86,63.85 180 bottom
R81  150k  [0402-TIGHT]  16.86,63.85 180 bottom
R82  1k  [0402-TIGHT]  45.37,48.85 180 top
R83  100k  [0402-TIGHT]  38.37,57.85 270 bottom
R84  220K  [0402-TIGHT]  40.37,57.85 90 bottom
R85  100k  [0402-TIGHT]  43.37,57.85 90 bottom
R86  150k  [0402-TIGHT]  42.37,57.85 90 bottom
R87  100k  [0402-TIGHT]  41.36,64.9 180 bottom
R88  150k  [0402-TIGHT]  39.36,64.9 180 bottom
R89  100k  [0402-TIGHT]  41.37,63.85 180 bottom
R90  150k  [0402-TIGHT]  39.37,63.85 180 bottom
R91  1k  [0402-TIGHT]  67.87,48.85 180 top
R92  100k  [0402-TIGHT]  60.87,57.85 270 bottom
R93  220K  [0402-TIGHT]  62.87,57.85 90 bottom
R94  100k  [0402-TIGHT]  65.87,57.85 90 bottom
R95  150k  [0402-TIGHT]  64.87,57.85 90 bottom
R96  100k  [0402-TIGHT]  63.86,64.9 180 bottom
R97  150k  [0402-TIGHT]  61.86,64.9 180 bottom
R98  100k  [0402-TIGHT]  63.87,63.85 180 bottom
R99  150k  [0402-TIGHT]  61.87,63.85 180 bottom
R100  1k  [0402-TIGHT]  90.38,48.85 180 top
R101  100k  [0402-TIGHT]  83.38,57.85 270 bottom
R102  220K  [0402-TIGHT]  85.38,57.85 90 bottom
R103  100k  [0402-TIGHT]  88.38,57.85 90 bottom
R104  150k  [0402-TIGHT]  87.38,57.85 90 bottom
R105  100k  [0402-TIGHT]  86.37,64.9 180 bottom
R106  150k  [0402-TIGHT]  84.37,64.9 180 bottom
R107  100k  [0402-TIGHT]  86.38,63.85 180 bottom
R108  150k  [0402-TIGHT]  84.38,63.85 180 bottom
R109  1k  [0402-TIGHT]  112.89,48.85 180 top
R110  100k  [0402-TIGHT]  105.89,57.85 270 bottom
R111  220K  [0402-TIGHT]  107.89,57.85 90 bottom
R112  100k  [0402-TIGHT]  110.89,57.85 90 bottom
R113  150k  [0402-TIGHT]  109.89,57.85 90 bottom
R114  100k  [0402-TIGHT]  108.88,64.9 180 bottom
R115  150k  [0402-TIGHT]  106.88,64.9 180 bottom
R116  100k  [0402-TIGHT]  108.89,63.85 180 bottom
R117  150k  [0402-TIGHT]  106.89,63.85 180 bottom
R118  1k  [0402-TIGHT]  135.4,48.85 180 top
R119  100k  [0402-TIGHT]  128.4,57.85 270 bottom
R120  220K  [0402-TIGHT]  130.4,57.85 90 bottom
R121  100k  [0402-TIGHT]  133.4,57.85 90 bottom
R122  150k  [0402-TIGHT]  132.4,57.85 90 bottom
R123  100k  [0402-TIGHT]  131.39,64.9 180 bottom
R124  150k  [0402-TIGHT]  129.39,64.9 180 bottom
R125  100k  [0402-TIGHT]  131.4,63.85 180 bottom
R126  150k  [0402-TIGHT]  129.4,63.85 180 bottom
R127  1k  [0402-TIGHT]  157.91,48.85 180 top
R128  100k  [0402-TIGHT]  150.91,57.85 270 bottom
R129  220K  [0402-TIGHT]  152.91,57.85 90 bottom
R130  100k  [0402-TIGHT]  155.91,57.85 90 bottom
R131  150k  [0402-TIGHT]  154.91,57.85 90 bottom
R132  100k  [0402-TIGHT]  153.9,64.9 180 bottom
R133  150k  [0402-TIGHT]  151.9,64.9 180 bottom
R134  100k  [0402-TIGHT]  153.91,63.85 180 bottom
R135  150k  [0402-TIGHT]  151.91,63.85 180 bottom
R136  1k  [0402-TIGHT]  180.41,48.85 180 top
R137  100k  [0402-TIGHT]  173.41,57.85 270 bottom
R138  220K  [0402-TIGHT]  175.41,57.85 90 bottom
R139  100k  [0402-TIGHT]  178.41,57.85 90 bottom
R140  150k  [0402-TIGHT]  177.41,57.85 90 bottom
R141  100k  [0402-TIGHT]  176.4,64.9 180 bottom
R142  150k  [0402-TIGHT]  174.4,64.9 180 bottom
R143  100k  [0402-TIGHT]  176.41,63.85 180 bottom
R144  150k  [0402-TIGHT]  174.41,63.85 180 bottom
U1  ARTEMIS_MODULESMD  [ARTEMIS_FP]  18.36,12 180 top
U2  TSV524  [QFN-16]  17.86,9 270 bottom
U3  ARTEMIS_MODULESMD  [ARTEMIS_FP]  40.86,12 180 top
U4  CH340E_MSOP10  [MSOP10]  47.36,12 90 bottom
U5  TSV524  [QFN-16]  40.36,9 270 bottom
U6  CH340E_MSOP10  [MSOP10]  24.86,12 90 bottom
U7  ARTEMIS_MODULESMD  [ARTEMIS_FP]  63.37,12 180 top
U8  CH340E_MSOP10  [MSOP10]  69.87,12 90 bottom
U9  TSV524  [QFN-16]  62.87,9 270 bottom
U10  ARTEMIS_MODULESMD  [ARTEMIS_FP]  85.88,12 180 top
U11  CH340E_MSOP10  [MSOP10]  92.38,12 90 bottom
U12  TSV524  [QFN-16]  85.38,9 270 bottom
U13  ARTEMIS_MODULESMD  [ARTEMIS_FP]  108.39,12 180 top
U14  CH340E_MSOP10  [MSOP10]  114.89,12 90 bottom
U15  TSV524  [QFN-16]  107.89,9 270 bottom
U16  ARTEMIS_MODULESMD  [ARTEMIS_FP]  130.9,12 180 top
U17  CH340E_MSOP10  [MSOP10]  137.4,12 90 bottom
U18  TSV524  [QFN-16]  130.4,9 270 bottom
U19  ARTEMIS_MODULESMD  [ARTEMIS_FP]  153.41,12 180 top
U20  CH340E_MSOP10  [MSOP10]  159.91,12 90 bottom
U21  TSV524  [QFN-16]  152.91,9 270 bottom
U22  ARTEMIS_MODULESMD  [ARTEMIS_FP]  175.91,12 180 top
U23  CH340E_MSOP10  [MSOP10]  182.41,12 90 bottom
U24  TSV524  [QFN-16]  175.41,9 270 bottom
U25  ARTEMIS_MODULESMD  [ARTEMIS_FP]  17.36,57.85 0 top
U26  CH340E_MSOP10  [MSOP10]  10.86,57.85 270 bottom
U27  TSV524  [QFN-16]  17.86,60.85 90 bottom
U28  ARTEMIS_MODULESMD  [ARTEMIS_FP]  39.87,57.85 0 top
U29  CH340E_MSOP10  [MSOP10]  33.37,57.85 270 bottom
U30  TSV524  [QFN-16]  40.37,60.85 90 bottom
U31  ARTEMIS_MODULESMD  [ARTEMIS_FP]  62.37,57.85 0 top
U32  CH340E_MSOP10  [MSOP10]  55.87,57.85 270 bottom
U33  TSV524  [QFN-16]  62.87,60.85 90 bottom
U34  ARTEMIS_MODULESMD  [ARTEMIS_FP]  84.88,57.85 0 top
U35  CH340E_MSOP10  [MSOP10]  78.38,57.85 270 bottom
U36  TSV524  [QFN-16]  85.38,60.85 90 bottom
U37  ARTEMIS_MODULESMD  [ARTEMIS_FP]  107.39,57.85 0 top
U38  CH340E_MSOP10  [MSOP10]  100.89,57.85 270 bottom
U39  TSV524  [QFN-16]  107.89,60.85 90 bottom
U40  ARTEMIS_MODULESMD  [ARTEMIS_FP]  129.9,57.85 0 top
U41  CH340E_MSOP10  [MSOP10]  123.4,57.85 270 bottom
U42  TSV524  [QFN-16]  130.4,60.85 90 bottom
U43  ARTEMIS_MODULESMD  [ARTEMIS_FP]  152.41,57.85 0 top
U44  CH340E_MSOP10  [MSOP10]  145.91,57.85 270 bottom
U45  TSV524  [QFN-16]  152.91,60.85 90 bottom
U46  ARTEMIS_MODULESMD  [ARTEMIS_FP]  174.91,57.85 0 top
U47  CH340E_MSOP10  [MSOP10]  168.41,57.85 270 bottom
U48  TSV524  [QFN-16]  175.41,60.85 90 bottom
U$1  [MICROMOD_MI_LOGO_.35]  8.46,11 0 top
U$2  [MICROMOD_MI_LOGO_.35]  30.96,11 0 top
U$3  [MICROMOD_LOGO_.35]  39.16,15.4 0 bottom
U$4  [MICROMOD_MI_LOGO_.35]  49.86,5.9 0 bottom
U$5  [MICROMOD_LOGO_.35]  16.66,15.4 0 bottom
U$6  [MICROMOD_ARTEMIS0]  30.63,18.16 0 top
U$7  [MICROMOD_MI_LOGO_.35]  27.36,5.9 0 bottom
U$8  [MICROMOD_ARTEMIS0]  8.13,18.16 0 top
U$9  [ARTEMIS0]  20.83,13.72 0 bottom
U$10  [ARTEMIS0]  43.33,13.72 0 bottom
U$11  [STAT0]  7.24,19.81 0 top
U$12  [STAT0]  29.75,19.81 0 top
U$13  [MICROMOD_MI_LOGO_.35]  53.47,11 0 top
U$14  [MICROMOD_LOGO_.35]  61.67,15.4 0 bottom
U$15  [MICROMOD_MI_LOGO_.35]  72.37,5.9 0 bottom
U$16  [MICROMOD_ARTEMIS0]  53.14,18.16 0 top
U$17  [ARTEMIS0]  65.84,13.72 0 bottom
U$18  [STAT0]  52.26,19.81 0 top
U$19  [MICROMOD_MI_LOGO_.35]  75.98,11 0 top
U$20  [MICROMOD_LOGO_.35]  84.18,15.4 0 bottom
U$21  [MICROMOD_MI_LOGO_.35]  94.88,5.9 0 bottom
U$22  [MICROMOD_ARTEMIS0]  75.65,18.16 0 top
U$23  [ARTEMIS0]  88.35,13.72 0 bottom
U$24  [STAT0]  74.76,19.81 0 top
U$25  [MICROMOD_MI_LOGO_.35]  98.49,11 0 top
U$26  [MICROMOD_LOGO_.35]  106.69,15.4 0 bottom
U$27  [MICROMOD_MI_LOGO_.35]  117.39,5.9 0 bottom
U$28  [MICROMOD_ARTEMIS0]  98.16,18.16 0 top
U$29  [ARTEMIS0]  110.86,13.72 0 bottom
U$30  [STAT0]  97.27,19.81 0 top
U$31  [MICROMOD_MI_LOGO_.35]  121,11 0 top
U$32  [MICROMOD_LOGO_.35]  129.2,15.4 0 bottom
U$33  [MICROMOD_MI_LOGO_.35]  139.9,5.9 0 bottom
U$34  [MICROMOD_ARTEMIS0]  120.67,18.16 0 top
U$35  [ARTEMIS0]  133.37,13.72 0 bottom
U$36  [STAT0]  119.78,19.81 0 top
U$37  [MICROMOD_MI_LOGO_.35]  143.51,11 0 top
U$38  [MICROMOD_LOGO_.35]  151.71,15.4 0 bottom
U$39  [MICROMOD_MI_LOGO_.35]  162.41,5.9 0 bottom
U$40  [MICROMOD_ARTEMIS0]  143.18,18.16 0 top
U$41  [ARTEMIS0]  155.88,13.72 0 bottom
U$42  [STAT0]  142.29,19.81 0 top
U$43  [MICROMOD_MI_LOGO_.35]  166.01,11 0 top
U$44  [MICROMOD_LOGO_.35]  174.21,15.4 0 bottom
U$45  [MICROMOD_MI_LOGO_.35]  184.91,5.9 0 bottom
U$46  [MICROMOD_ARTEMIS0]  165.68,18.16 0 top
U$47  [ARTEMIS0]  178.38,13.72 0 bottom
U$48  [STAT0]  164.8,19.81 0 top
U$49  [MICROMOD_MI_LOGO_.35]  27.26,58.85 180 top
U$50  [MICROMOD_LOGO_.35]  19.06,54.45 180 bottom
U$51  [MICROMOD_MI_LOGO_.35]  8.36,63.95 180 bottom
U$52  [MICROMOD_ARTEMIS0]  27.59,51.69 180 top
U$53  [ARTEMIS0]  14.89,56.13 180 bottom
U$54  [STAT0]  28.48,50.04 180 top
U$55  [MICROMOD_MI_LOGO_.35]  49.77,58.85 180 top
U$56  [MICROMOD_LOGO_.35]  41.57,54.45 180 bottom
U$57  [MICROMOD_MI_LOGO_.35]  30.87,63.95 180 bottom
U$58  [MICROMOD_ARTEMIS0]  50.1,51.69 180 top
U$59  [ARTEMIS0]  37.4,56.13 180 bottom
U$60  [STAT0]  50.99,50.04 180 top
U$61  [MICROMOD_MI_LOGO_.35]  72.27,58.85 180 top
U$62  [MICROMOD_LOGO_.35]  64.07,54.45 180 bottom
U$63  [MICROMOD_MI_LOGO_.35]  53.37,63.95 180 bottom
U$64  [MICROMOD_ARTEMIS0]  72.6,51.69 180 top
U$65  [ARTEMIS0]  59.9,56.13 180 bottom
U$66  [STAT0]  73.49,50.04 180 top
U$67  [MICROMOD_MI_LOGO_.35]  94.78,58.85 180 top
U$68  [MICROMOD_LOGO_.35]  86.58,54.45 180 bottom
U$69  [MICROMOD_MI_LOGO_.35]  75.88,63.95 180 bottom
U$70  [MICROMOD_ARTEMIS0]  95.11,51.69 180 top
U$71  [ARTEMIS0]  82.41,56.13 180 bottom
U$72  [STAT0]  96,50.04 180 top
U$73  [MICROMOD_MI_LOGO_.35]  117.29,58.85 180 top
U$74  [MICROMOD_LOGO_.35]  109.09,54.45 180 bottom
U$75  [MICROMOD_MI_LOGO_.35]  98.39,63.95 180 bottom
U$76  [MICROMOD_ARTEMIS0]  117.62,51.69 180 top
U$77  [ARTEMIS0]  104.92,56.13 180 bottom
U$78  [STAT0]  118.51,50.04 180 top
U$79  [MICROMOD_MI_LOGO_.35]  139.8,58.85 180 top
U$80  [MICROMOD_LOGO_.35]  131.6,54.45 180 bottom
U$81  [MICROMOD_MI_LOGO_.35]  120.9,63.95 180 bottom
U$82  [MICROMOD_ARTEMIS0]  140.13,51.69 180 top
U$83  [ARTEMIS0]  127.43,56.13 180 bottom
U$84  [STAT0]  141.02,50.04 180 top
U$85  [MICROMOD_MI_LOGO_.35]  162.31,58.85 180 top
U$86  [MICROMOD_LOGO_.35]  154.11,54.45 180 bottom
U$87  [MICROMOD_MI_LOGO_.35]  143.41,63.95 180 bottom
U$88  [MICROMOD_ARTEMIS0]  162.64,51.69 180 top
U$89  [ARTEMIS0]  149.94,56.13 180 bottom
U$90  [STAT0]  163.53,50.04 180 top
U$91  [MICROMOD_MI_LOGO_.35]  184.81,58.85 180 top
U$92  [MICROMOD_LOGO_.35]  176.61,54.45 180 bottom
U$93  [MICROMOD_MI_LOGO_.35]  165.91,63.95 180 bottom
U$94  [MICROMOD_ARTEMIS0]  185.14,51.69 180 top
U$95  [ARTEMIS0]  172.44,56.13 180 bottom
U$96  [STAT0]  186.03,50.04 180 top
Y1  32.768kHz  [CRYSTAL-SMD-3.2X1.5MM]  27.06,14 270 top
Y2  32.768kHz  [CRYSTAL-SMD-3.2X1.5MM]  49.56,14 270 top
Y3  32.768kHz  [CRYSTAL-SMD-3.2X1.5MM]  72.07,14 270 top
Y4  32.768kHz  [CRYSTAL-SMD-3.2X1.5MM]  94.58,14 270 top
Y5  32.768kHz  [CRYSTAL-SMD-3.2X1.5MM]  117.09,14 270 top
Y6  32.768kHz  [CRYSTAL-SMD-3.2X1.5MM]  139.6,14 270 top
Y7  32.768kHz  [CRYSTAL-SMD-3.2X1.5MM]  162.11,14 270 top
Y8  32.768kHz  [CRYSTAL-SMD-3.2X1.5MM]  184.61,14 270 top
Y9  32.768kHz  [CRYSTAL-SMD-3.2X1.5MM]  8.66,55.85 90 top
Y10  32.768kHz  [CRYSTAL-SMD-3.2X1.5MM]  31.17,55.85 90 top
Y11  32.768kHz  [CRYSTAL-SMD-3.2X1.5MM]  53.67,55.85 90 top
Y12  32.768kHz  [CRYSTAL-SMD-3.2X1.5MM]  76.18,55.85 90 top
Y13  32.768kHz  [CRYSTAL-SMD-3.2X1.5MM]  98.69,55.85 90 top
Y14  32.768kHz  [CRYSTAL-SMD-3.2X1.5MM]  121.2,55.85 90 top
Y15  32.768kHz  [CRYSTAL-SMD-3.2X1.5MM]  143.71,55.85 90 top
Y16  32.768kHz  [CRYSTAL-SMD-3.2X1.5MM]  166.21,55.85 90 top

## Library data of the parts
C1 C8-C10 C14 C18 C20 C21 C25-C27 C30 C37-C39 C41 C48-C50 C52 C59-C61 C63 C70-C72 C74 C81-C83 C85 C92-C94 C96 C103-C105 C107 C114-C116 C118 C125-C127 C129 C136-C138 C140 C147-C149 C151 C158-C160 C162 C169-C171 C173 = SparkFun-Capacitors; PROD_ID: CAP-12416
C2 C15 C31 C42 C53 C64 C75 C86 C97 C108 C119 C130 C141 C152 C163 C174 = SparkFun-Capacitors; PROD_ID: CAP-14846
C3 C16 C32 C43 C54 C65 C76 C87 C98 C109 C120 C131 C142 C153 C164 C175 = SparkFun-Capacitors; PROD_ID: CAP-12417
C4 C19 C33 C44 C55 C66 C77 C88 C99 C110 C121 C132 C143 C154 C165 C176 = SparkFun-Capacitors; PROD_ID: CAP-11015
C5 C6 C11 C13 C22 C23 C34 C35 C45 C46 C56 C57 C67 C68 C78 C79 C89 C90 C100 C101 C111 C112 C122 C123 C133 C134 C144 C145 C155 C156 C166 C167 = SparkFun-Capacitors; PROD_ID: CAP-13063
C7 C17 C24 C36 C47 C58 C69 C80 C91 C102 C113 C124 C135 C146 C157 C168 = SparkFun-Capacitors; PROD_ID: CAP-14847
C12 C28 C29 C40 C51 C62 C73 C84 C95 C106 C117 C128 C139 C150 C161 C172 = SparkFun-Capacitors; PROD_ID: CAP-14280
D1 D2 D4 D6 D9 D11 D13 D15 D17 D19 D21 D23 D25 D27 D29 D31 = SparkFun-LED; PROD_ID: DIO-08575
D3 D5 D7 D8 D10 D12 D14 D16 D18 D20 D22 D24 D26 D28 D30 D32 = SparkFun-DiscreteSemi; PROD_ID: DIO-11623
E$1-E$4 FD1-FD64 LOGO1-LOGO48 = SparkFun-Aesthetics
E$5 E$6 = SparkFun-Retired
J1-J16 U$1-U$5 U$7 U$13-U$15 U$19-U$21 U$25-U$27 U$31-U$33 U$37-U$39 U$43-U$45 U$49-U$51 U$55-U$57 U$61-U$63 U$67-U$69 U$73-U$75 U$79-U$81 U$85-U$87 U$91-U$93 = SparkFun-MicroMod
R1 R8 R19 R28 R37 R46 R55 R64 R73 R82 R91 R100 R109 R118 R127 R136 = SparkFun-Resistors; PROD_ID: RES-14342
R2 R3 R6 R9 R11 R13 R14 R17 R20 R22 R24 R26 R29 R31 R33 R35 R38 R40 R42 R44 R47 R49 R51 R53 R56 R58 R60 R62 R65 R67 R69 R71 R74 R76 R78 R80 R83 R85 R87 R89 R92 R94 R96 R98 R101 R103 R105 R107 R110 R112 R114 R116 R119 R121 R123 R125 R128 R130 R132 R134 R137 R139 R141 R143 = SparkFun-Resistors; PROD_ID: RES-13495
R4 R5 R7 R12 R16 R18 R23 R25 R27 R32 R34 R36 R41 R43 R45 R50 R52 R54 R59 R61 R63 R68 R70 R72 R77 R79 R81 R86 R88 R90 R95 R97 R99 R104 R106 R108 R113 R115 R117 R122 R124 R126 R131 R133 R135 R140 R142 R144 = SparkFun-Resistors; PROD_ID: RES-15093
R10 R15 R21 R30 R39 R48 R57 R66 R75 R84 R93 R102 R111 R120 R129 R138 = SparkFun-Resistors; PROD_ID: RES-15094
U1 U3 U7 U10 U13 U16 U19 U22 U25 U28 U31 U34 U37 U40 U43 U46 = SparkFun-IC-Microcontroller; PROD_ID: SUB-14402
U2 U5 U9 U12 U15 U18 U21 U24 U27 U30 U33 U36 U39 U42 U45 U48 = OpAmp; PROD_ID: IC-15092
U4 U6 U8 U11 U14 U17 U20 U23 U26 U29 U32 U35 U38 U41 U44 U47 = SparkFun-IC-Comms; PROD_ID: IC-14135
U$6 U$8-U$12 U$16-U$18 U$22-U$24 U$28-U$30 U$34-U$36 U$40-U$42 U$46-U$48 U$52-U$54 U$58-U$60 U$64-U$66 U$70-U$72 U$76-U$78 U$82-U$84 U$88-U$90 U$94-U$96 = output
Y1-Y16 = SparkFun-Clocks; PROD_ID: XTAL-13062